# Altium PCB LM2596.PcbDoc
Units mm, origin at the board's own origin, x right, y up, seen from the top; angles counter-clockwise.
Board outline 92.58 x 34.92 mm, 2 copper layers (Top Layer, Bottom Layer); 42 components, 6 nets, 99 pads, 0 vias.
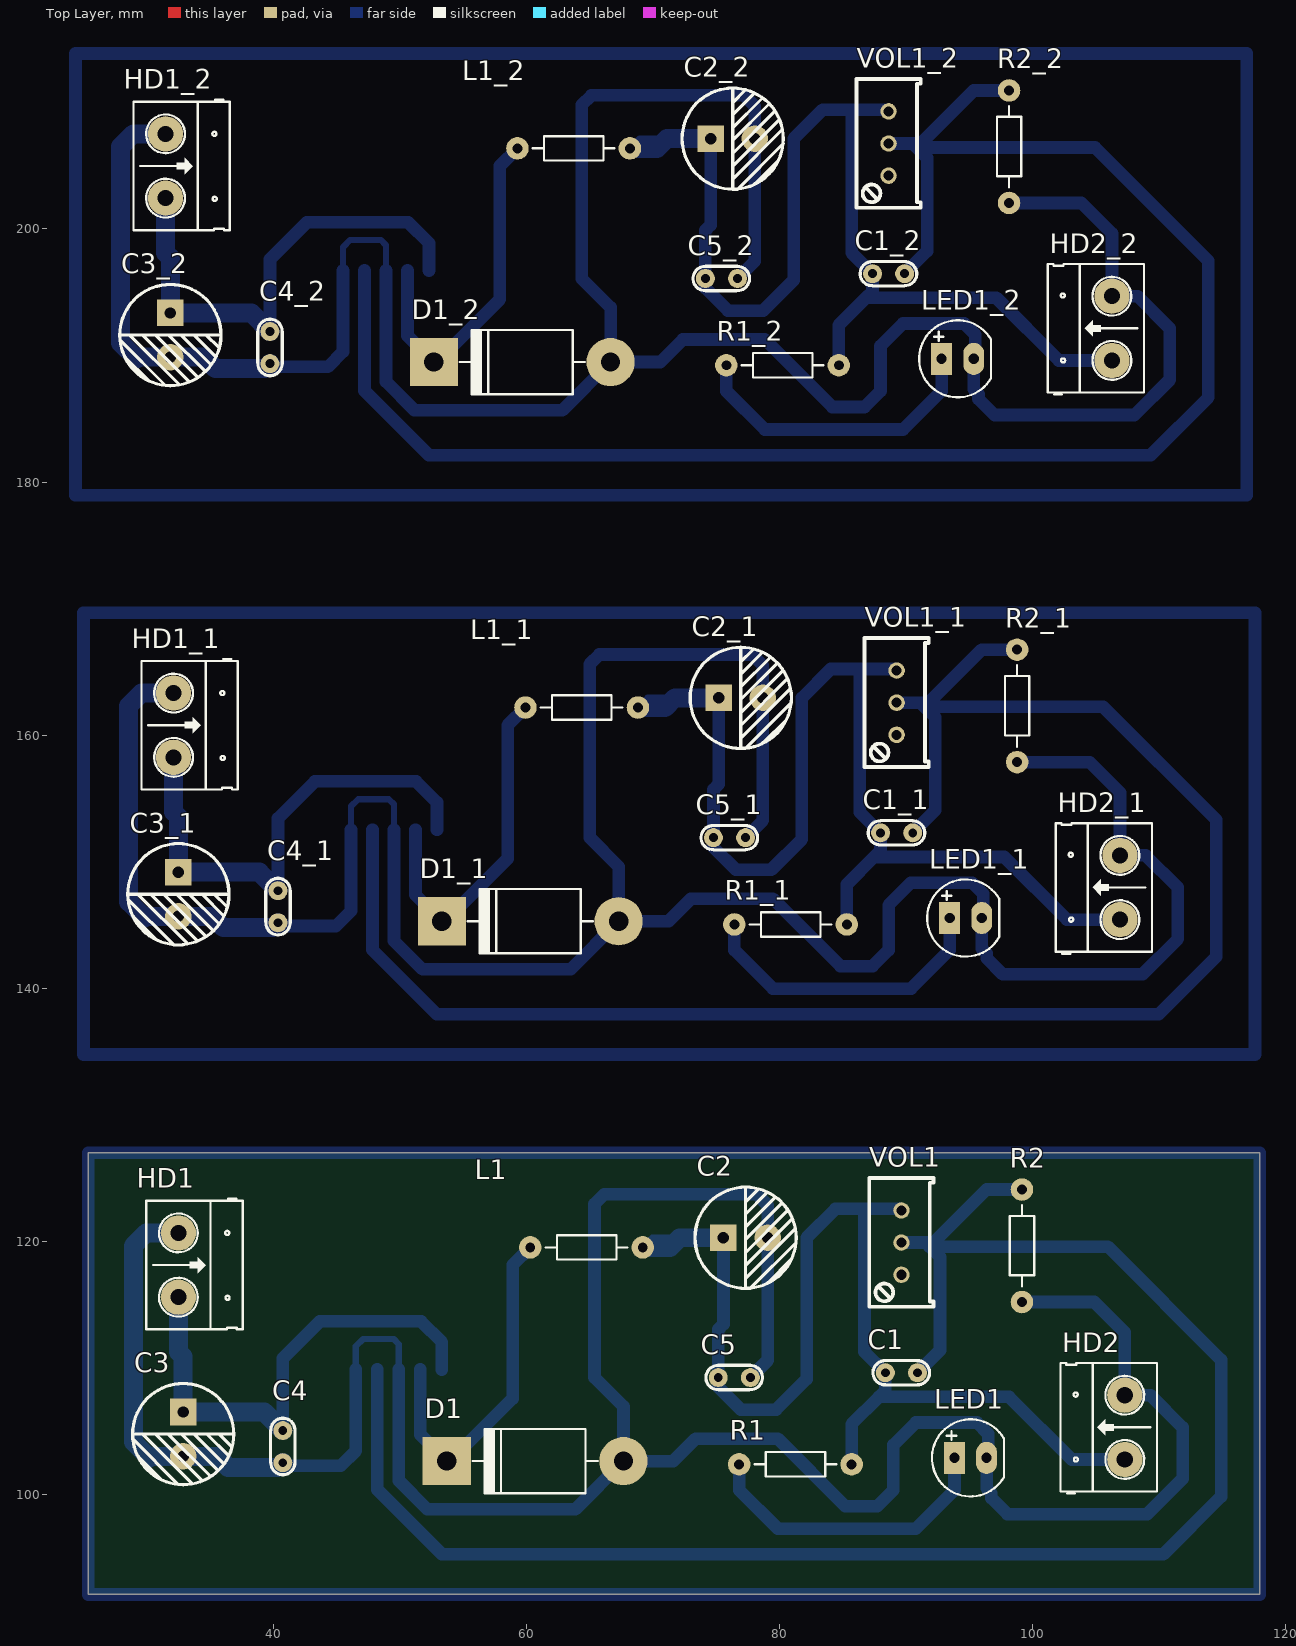
[diagram p0: Top Layer view]
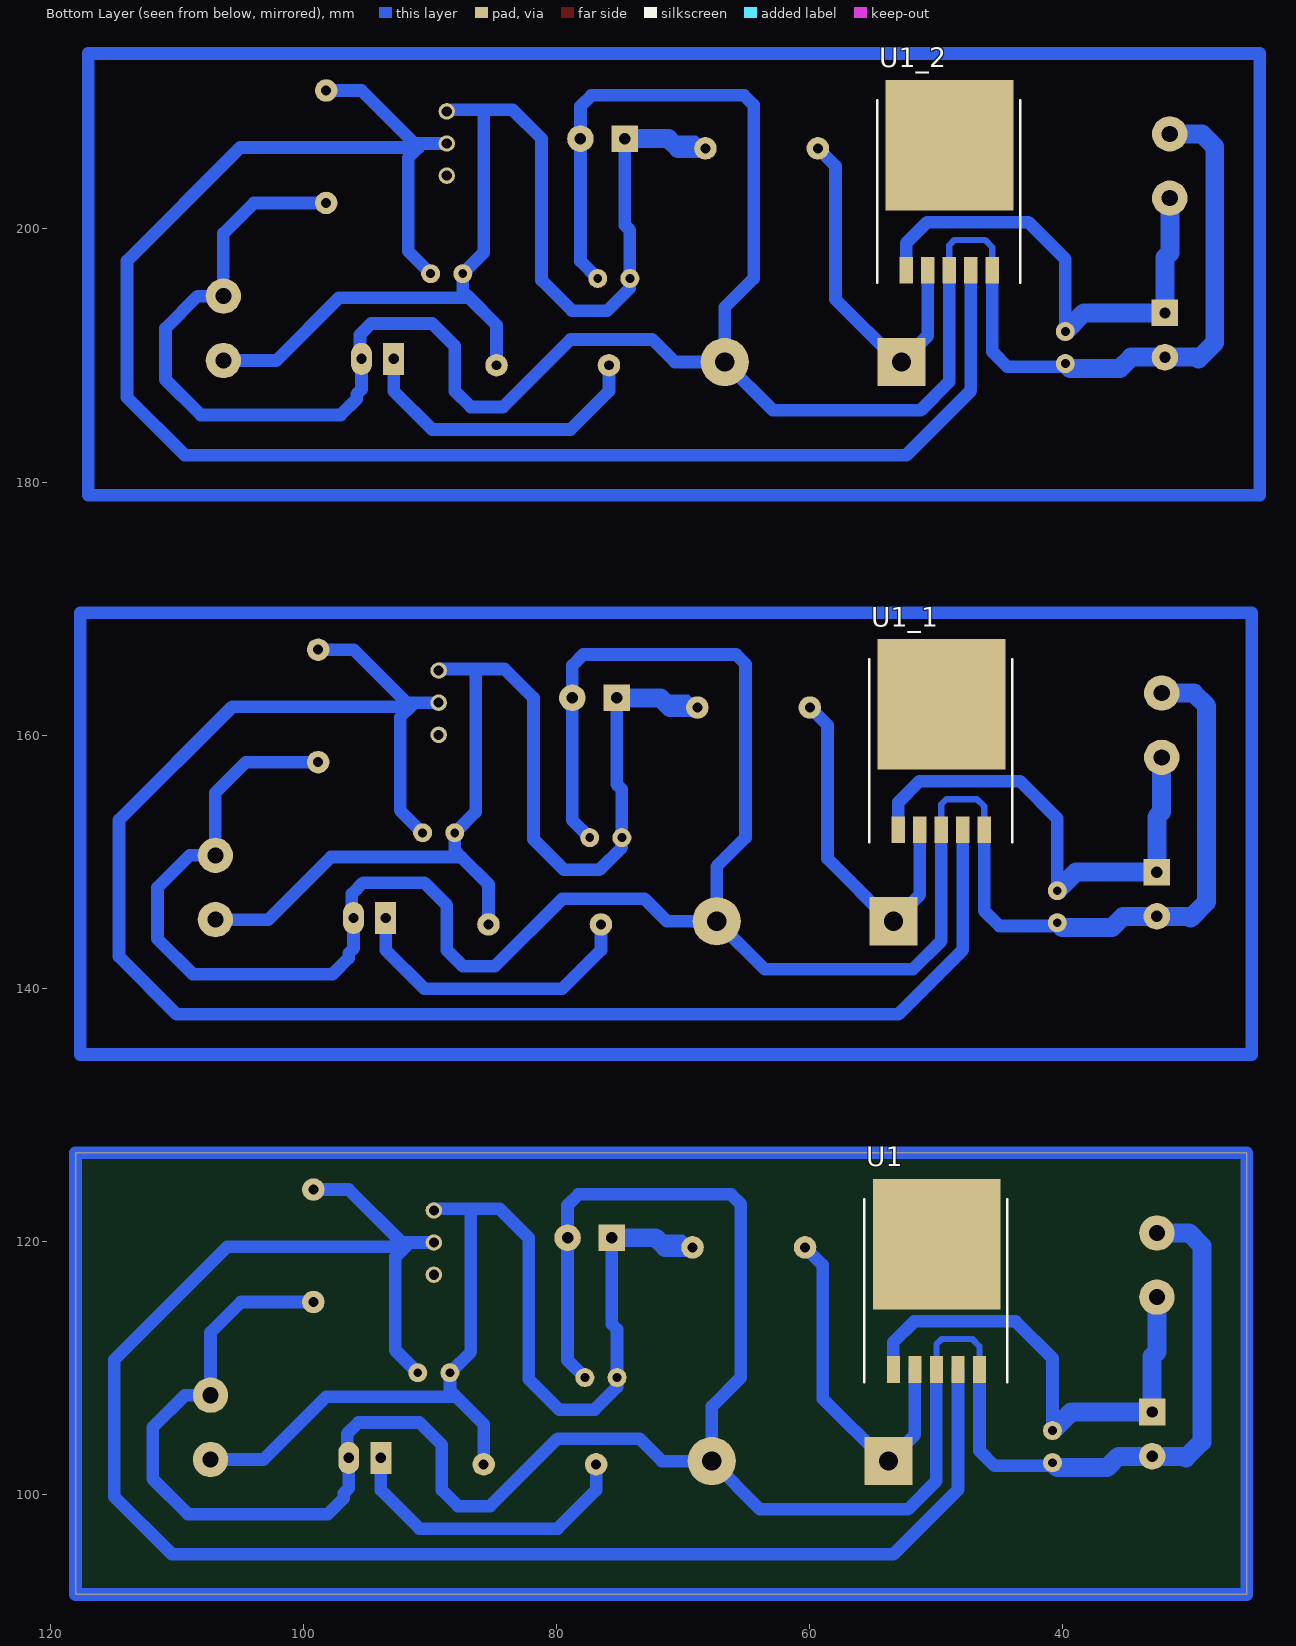
[diagram p1: Bottom Layer view, seen from below]

## Layer stack, top to bottom
Top Solder: solder mask 0.0102, Solder Resist, Dk 3.5
Top Layer: signal copper 0.0356
Dielectric 1: dielectric 0.32, FR-4, Dk 4.8
Bottom Layer: signal copper 0.0356
Bottom Solder: solder mask 0.0102, Solder Resist, Dk 3.5

## Board outline
25.4,92.075 117.983,92.075 117.983,127 25.4,127

## Design rules (kind name [scope] priority, off if disabled: settings)
Clearance [All] p1: gap=0.254 ignorepadtopadclearanceinfootprint=FALSE except(0: Arc-Hole Track-Hole SMDPad-Hole THPad-Hole Via-Hole Fill-Hole Poly-Hole Region-Hole Text-Hole)
PolygonConnect [All] p1: connectstyle=Relief reliefconductorwidth=0.254 reliefentries=4 polygonreliefangle="90 Angle" airgapwidth=0.254
RoutingVias [All] p1: holewidth=0.711 width=1.27 viastyle="Through Hole" minholewidth=0.711 minwidth=1.27 maxholewidth=0.711 maxwidth=1.27
SolderMaskExpansion [All] p1: expansion=0.102
Width [All] p1: maxlimit=1.5 minlimit=0.5 preferedwidth=1
30 further rules are at their usual default settings.

## Classes and differential pairs
component class LM2596: C1 C2 C3 C4 C5 D1 HD1 HD2 L1 LED1 R1 R2 U1 VOL1

## Components (designator, comment, footprint, x,y, rotation, side; value= is the part's Value field where it differs from the comment)
C1 "470uF 16V" "tu gom" 89.662,109.601 r0 top
C1_1 "470uF 16V" "tu gom" 89.281,152.273 r0 top (schematic designator C1)
C1_2 "470uF 16V" "tu gom" 88.646,196.469 r0 top (schematic designator C1)
C2 "220uF-25V" "Tu hoa 8mm" 77.343,120.269 r0 top
C2_1 "220uF-25V" "Tu hoa 8mm" 76.962,162.941 r0 top (schematic designator C2)
C2_2 "220uF-25V" "Tu hoa 8mm" 76.327,207.137 r0 top (schematic designator C2)
C3 "100uF-50V" "tu hoa 8mm" 32.893,104.747 r270 top
C3_1 "100uF-50V" "tu hoa 8mm" 32.512,147.419 r270 top (schematic designator C3)
C3_2 "100uF-50V" "tu hoa 8mm" 31.877,191.615 r270 top (schematic designator C3)
C4 "104" "tu gom" 40.767,103.759 r270 top
C4_1 "104" "tu gom" 40.386,146.431 r270 top (schematic designator C4)
C4_2 "104" "tu gom" 39.751,190.627 r270 top (schematic designator C4)
C5 "104" "tu gom" 76.454,109.22 r0 top
C5_1 "104" "tu gom" 76.073,151.892 r0 top (schematic designator C5)
C5_2 "104" "tu gom" 75.438,196.088 r0 top (schematic designator C5)
D1 "1N5408" D5A 53.721,102.616 r0 top
D1_1 "1N5408" D5A 53.34,145.288 r0 top (schematic designator D1)
D1_2 "1N5408" D5A 52.705,189.484 r0 top (schematic designator D1)
HD1 "Header 2" HED2 32.512,120.65 r270 top
HD1_1 "Header 2" HED2 32.131,163.322 r270 top (schematic designator HD1)
HD1_2 "Header 2" HED2 31.496,207.518 r270 top (schematic designator HD1)
HD2 "Header 2" HED2 107.315,102.743 r90 top
HD2_1 "Header 2" HED2 106.934,145.415 r90 top (schematic designator HD2)
HD2_2 "Header 2" HED2 106.299,189.611 r90 top (schematic designator HD2)
L1 "33mH" R1/4W 60.325,119.507 r0 top
L1_1 "33mH" R1/4W 59.944,162.179 r0 top (schematic designator L1)
L1_2 "33mH" R1/4W 59.309,206.375 r0 top (schematic designator L1)
LED1 "LED" LED-5-RED 93.853,102.87 r0 top value="LED 3 ly Single Colour"
LED1_1 "LED" LED-5-RED 93.472,145.542 r0 top value="LED 3 ly Single Colour" (schematic designator LED1)
LED1_2 "LED" LED-5-RED 92.837,189.738 r0 top value="LED 3 ly Single Colour" (schematic designator LED1)
R1 "1K" R1/4W 76.835,102.362 r0 top value="R1/4W - 1K"
R1_1 "1K" R1/4W 76.454,145.034 r0 top value="R1/4W - 1K" (schematic designator R1)
R1_2 "1K" R1/4W 75.819,189.23 r0 top value="R1/4W - 1K" (schematic designator R1)
R2 "1k" R1/4W 99.187,115.189 r90 top value="R1/4W - 1K"
R2_1 "1k" R1/4W 98.806,157.861 r90 top value="R1/4W - 1K" (schematic designator R2)
R2_2 "1k" R1/4W 98.171,202.057 r90 top value="R1/4W - 1K" (schematic designator R2)
U1 "LM2596-ADJ" D2-PACK5 53.34,109.855 r180 bottom
U1_1 "LM2596-ADJ" D2-PACK5 52.959,152.527 r180 bottom (schematic designator U1)
U1_2 "LM2596-ADJ" D2-PACK5 52.324,196.723 r180 bottom (schematic designator U1)
VOL1 "10K" VR1 89.662,117.348 r90 top value="Volume Dual 50K"
VOL1_1 "10K" VR1 89.281,160.02 r90 top value="Volume Dual 50K" (schematic designator VOL1)
VOL1_2 "10K" VR1 88.646,204.216 r90 top value="Volume Dual 50K" (schematic designator VOL1)

## Footprints (in the part's own frame and the unit in brackets; to place one, negate y for a bottom-side part, rotate by r counter-clockwise, add the part's x,y. Pads: shape width x height; smd on the part's side, far side on the other; paste and mask are expansions set on the pad)
D2-PACK5 [mm] "D2-PAK; 5 Leads; Body 14.4 (inc. leads) x 10.4 mm (LxW max)"
  rect 1.05x2.1 smd: 1(0,0) 2(1.7,0) 3(3.4,0) 4(5.1,0) 5(6.8,0)
  rect 10.1x10.3 smd: 3(3.429,9.906)
  silkscreen extent -2.29,-0.99 9.02,13.46, body extent -1.6,-0.38 8.4,15.29, height 5.18
D5A [mil] "Diode 5A, W 200mil, L 550mil"
  round 150 hole 60: 1(550,0)
  rect 150x150 hole 60: 2(0,0)
  silkscreen extent 80,-100 470,100, body extent -52,-106 590,103, height 254
HED2 [mil] "Header 2, 2 pin, hight 300mil, Pin to Pin 200, Colour Green"
  round 110 hole 50: 1(0,0) 2(200,0)
  silkscreen extent -106,-100 300,200, body extent -92,-140 302,155, height 394
LED-5-RED [mil] "LED 2 PIN, 5 ly , Only colour,pin to pin 100mil"
  rect 65x100 hole 32: 1(0,0)
  oval 65x100 hole 32: 2(100,0)
  silkscreen extent -70,-120 154,120, body extent -65,-119 149,118, height 339
R1/4W [mil] "R 1/4W, 2 Pin, 350mil"
  round 70 hole 31: 1(0,0) 2(350,0)
  silkscreen extent 48,-38 302,38, body extent -40,-47 386,47, height 111
"tu gom" [mm] "Tu gom mini"
  round 1.5 hole 0.7: 1(-1.27,0) 2(1.27,0)
  silkscreen extent -2.25,-0.97 2.22,0.97, body extent -2.92,-0.85 2.92,0.85, height 6.12
"Tu hoa 8mm" [mm]
  rect 2.1x2.1 hole 0.9: 1(-1.75,0)
  round 2.1 hole 0.9: 2(1.75,0)
  silkscreen extent -4,-4 4,4, body extent -4.1,-4.07 4.1,4.13, height 14.4
"tu hoa 8mm" [mm]
  rect 2.1x2.1 hole 0.9: 1(-1.75,0)
  round 2.1 hole 0.9: 2(1.75,0)
  silkscreen extent -4,-4 4,4, body extent -4.1,-4.07 4.1,4.13, height 14.4
VR1 [mm] "Variable Resistor"
  round 1.3 hole 0.8 mask+0.1: 1(0,0) 2(2.54,0) 3(5.08,0)
  silkscreen extent -2.54,-2.54 7.65,2.54, body extent -2.22,-3.3 7.3,2.79, height 11.56

## Part data
C1 C1_1 C1_2 C4 C4_1 C4_2 C5 C5_1 C5_2: library part "Tu gom 100 50V", "C?m", Chung_Loai=C?m, Don_Vi=Con, Ma_Hang=MH004765, So_Chan=2, Ten_Linh_Kien="T? g?m 100 10pF 50V"
C2 C2_1 C2_2: library part "Tu Hoa 220uF 25V 8x10", "C?m", Chung_Loai=C?m, Don_Vi=Con, Ma_Hang=MH006864, So_Chan=2, Ten_Linh_Kien="T? Hóa 220uF 25V 8x10MM"
C3 C3_1 C3_2: library part "Tu Hoa 100uF 50V 8x11", "C?m", Chung_Loai=C?m, Don_Vi=Con, Ma_Hang=MH006872, So_Chan=2, Ten_Linh_Kien="T? Hóa 100uF 50V 8x11MM"
D1 D1_1 D1_2: library part D5A, "Diode 5A"
HD1 HD1_1 HD1_2 HD2 HD2_1 HD2_2: library part Hed2, "Header 2 (Green)"
L1 L1_1 L1_2: library part "Cuon cam 220uH", "C?m", Chung_Loai=C?m, Don_Vi=Con, Ma_Hang=MH002208, So_Chan=2, Ten_Linh_Kien="Cu?n C?m 220uH 3A 8x10MM"
LED1 LED1_1 LED1_2: "LED Single colour Green and Red"
R1 R1_1 R1_2 R2 R2_1 R2_2: library part R1/4W, "Resistor 1/4W"
U1 U1_1 U1_2: library part LM2596, "Simple Switcher 3A Step Down Voltage Regulator", Code_JEDEC=TS-001-AA, ComponentLink1Description="Manufacturer Link", ComponentLink1URL=http://www.national.com/, ComponentLink2Description=Datasheet, ComponentLink2URL=H:\LIBRARY\LIBRARY.Datasheet\LM2576.pdf, ComponentLink3Description="URL Link1", ComponentLink3URL=http://www.national.com/pf/LM/LM2575HV.html, DatasheetVersion=May-1999, Note="Tab is connected to GND", PackageDescription="TO, Thru-Hole, Vertical, Heatsink Mounted; 5 In-Line Leads; Pitch 1.70 mm", PackageReference=T05A, PackageVersion=2000, Price="15000 VND", Published=15-Apr-2002, Publisher="Altium Limited"
VOL1 VOL1_1 VOL1_2: library part VOL-D, "Volume control Dual"

## Nets (pads, with @x,y where several pads share a name; then routed paths per layer and width w, separated by ;. In a path a pad name is that pad's centre, name@x,y a point inside that pad or via, vN(x,y) a via of type N, cw(c..) or ccw(c..) an arc to the next point about the centre after c; other vN are vias at no path point)
GND: C2.2 C3.2 C4.2 C5.2 D1.1 HD1.1 HD2.2 LED1.2 R2.1 U1.3@49.94,109.855 U1.5 | length 214.5
  Bottom Layer w0.5: U1.5 46.54,111.691 47.117,112.268 49.53,112.268 49.94,111.858 U1.3@49.94,109.855
  Bottom Layer w1: C4.2 41.021,102.235 45.339,102.235 46.54,103.436 U1.5 ; U1.3@49.94,109.855 49.94,101.063 52.197,98.806 63.881,98.806 D1.1 ; C5.2 79.093,110.589 C2.2 79.093,122.837 78.232,123.698 66.167,123.698 65.405,122.936 65.405,109.22 67.691,106.934 D1.1 ; R2.1 104.902,115.189 107.315,112.776 HD2.2 109.347,107.823 111.887,105.283 111.887,101.219 109.093,98.425 98.044,98.425 96.774,99.695 96.774,100.076 96.393,100.457 LED1.2 96.52,102.997 96.52,104.775 95.631,105.664 90.805,105.664 89.027,103.886 89.027,100.33 87.757,99.06 85.217,99.06 79.883,104.394 73.406,104.394 71.628,102.616 D1.1
  Bottom Layer w1.5: HD1.1 29.972,120.65 28.956,119.634 28.956,104.14 30.226,102.87 30.353,102.997 C3.2 35.56,102.997 36.449,102.108 40.386,102.108 C4.2
NetC1_1: C1.1 C2.1 C5.1 HD2.1 L1.2 R1.2 VOL1.3 | length 93.8
  Bottom Layer w0.5: L1.2 69.977,120.269 72.136,120.269
  Bottom Layer w1: C2.1 75.593,113.439 75.184,113.03 C5.1 75.184,108.458 76.962,106.68 79.756,106.68 82.169,109.093 82.169,120.269 84.455,122.555 86.741,122.555 ; R1.2 85.725,105.537 87.884,107.696 ; VOL1.3 89.535,122.555 86.741,122.555 ; HD2.1 103.124,102.743 98.171,107.696 87.884,107.696 ; 86.741,122.555 86.741,111.252 C1.1 88.392,108.204 87.884,107.696
  Bottom Layer w1.5: L1.2 71.374,119.507 72.136,120.269 C2.1
NetC1_2: C1.2 R2.2 U1.4 VOL1.2 | length 140.5
  Bottom Layer w1: U1.4 48.24,100.35 53.34,95.25 110.363,95.25 114.935,99.822 114.935,110.617 105.981,119.57 91.885,119.57 ; VOL1.2 91.567,119.888 ; C1.2 92.71,111.379 92.71,118.745 91.885,119.57 ; R2.2 96.393,124.079 92.202,119.888 91.567,119.888 ; 91.567,119.888 91.885,119.57
NetC3_1: C3.1 C4.1 HD1.2 U1.1 | length 40.1
  Bottom Layer w1: C4.1 40.767,110.744 43.688,113.665 51.689,113.665 53.34,112.014 U1.1
  Bottom Layer w1.5: HD1.2 32.512,111.252 32.893,110.871 C3.1 39.299,106.497 C4.1
NetD1_2: D1.2 L1.1 U1.2 | length 27.9
  Bottom Layer w1: U1.2 51.64,104.697 D1.2 53.975,102.616 58.928,107.569 58.928,118.11 L1.1
NetLED1_1: LED1.1 R1.1 | length 24.1
  Bottom Layer w1: R1.1 76.835,100.33 79.883,97.282 90.805,97.282 93.853,100.33 LED1.1
pads on no net: C1_1.1 C1_1.2 C1_2.1 C1_2.2 C2_1.1 C2_1.2 C2_2.1 C2_2.2 C3_1.1 C3_1.2 C3_2.1 C3_2.2 C4_1.1 C4_1.2 C4_2.1 C4_2.2 C5_1.1 C5_1.2 C5_2.1 C5_2.2 D1_1.1 D1_1.2 D1_2.1 D1_2.2 HD1_1.1 HD1_1.2 HD1_2.1 HD1_2.2 HD2_1.1 HD2_1.2 HD2_2.1 HD2_2.2 L1_1.1 L1_1.2 L1_2.1 L1_2.2 LED1_1.1 LED1_1.2 LED1_2.1 LED1_2.2 R1_1.1 R1_1.2 R1_2.1 R1_2.2 R2_1.1 R2_1.2 R2_2.1 R2_2.2 U1.3@49.911,119.761 U1_1.1 U1_1.2 U1_1.3 U1_1.4 U1_1.5 U1_2.1 U1_2.2 U1_2.3 U1_2.4 U1_2.5 VOL1.1 VOL1_1.1 VOL1_1.2 VOL1_1.3 VOL1_2.1 VOL1_2.2 VOL1_2.3
copper on no net: | length 1846.7
  Bottom Layer w0.5: 45.524,196.723 45.524,198.559 46.101,199.136 48.514,199.136 48.924,198.726 48.924,196.723 ; 46.159,152.527 46.159,154.363 46.736,154.94 49.149,154.94 49.559,154.53 49.559,152.527 ; 68.199,206.375 68.961,207.137 71.12,207.137 ; 68.834,162.179 69.596,162.941 71.755,162.941
  Bottom Layer w1: 39.751,189.357 40.005,189.103 44.323,189.103 45.524,190.304 45.524,196.723 ; 39.751,191.897 39.751,197.612 42.672,200.533 50.673,200.533 52.324,198.882 52.324,196.723 ; 40.386,145.161 40.64,144.907 44.958,144.907 46.159,146.108 46.159,152.527 ; 40.386,147.701 40.386,153.416 43.307,156.337 51.308,156.337 52.959,154.686 52.959,152.527 ; 47.224,196.723 47.224,187.218 52.324,182.118 109.347,182.118 113.919,186.69 113.919,197.485 104.965,206.439 90.868,206.439 ; 47.859,152.527 47.859,143.022 52.959,137.922 109.982,137.922 114.554,142.494 114.554,153.289 105.6,162.243 91.504,162.243 ; 48.924,196.723 48.924,187.931 51.181,185.674 62.865,185.674 66.675,189.484 ; 49.559,152.527 49.559,143.735 51.816,141.478 63.5,141.478 67.31,145.288 ; 50.624,196.723 50.624,191.565 52.705,189.484 52.959,189.484 57.912,194.437 57.912,204.978 59.309,206.375 ; 51.259,152.527 51.259,147.369 53.34,145.288 53.594,145.288 58.547,150.241 58.547,160.782 59.944,162.179 ; 74.577,207.137 74.577,200.307 74.168,199.898 74.168,196.088 74.168,195.326 75.946,193.548 78.74,193.548 81.153,195.961 81.153,207.137 83.439,209.423 85.725,209.423 ; 75.212,162.941 75.212,156.111 74.803,155.702 74.803,151.892 74.803,151.13 76.581,149.352 79.375,149.352 81.788,151.765 81.788,162.941 84.074,165.227 86.36,165.227 ; 75.819,189.23 75.819,187.198 78.867,184.15 89.789,184.15 92.837,187.198 92.837,189.738 ; 76.454,145.034 76.454,143.002 79.502,139.954 90.424,139.954 93.472,143.002 93.472,145.542 ; 76.708,196.088 78.077,197.457 78.077,207.137 78.077,209.705 77.216,210.566 65.151,210.566 64.389,209.804 64.389,196.088 66.675,193.802 66.675,189.484 ; 77.343,151.892 78.712,153.261 78.712,162.941 78.712,165.509 77.851,166.37 65.786,166.37 65.024,165.608 65.024,151.892 67.31,149.606 67.31,145.288 ; 84.709,189.23 84.709,192.405 86.868,194.564 ; 85.344,145.034 85.344,148.209 87.503,150.368 ; 88.646,206.756 90.551,206.756 ; 88.646,209.296 88.519,209.423 85.725,209.423 ; 89.281,162.56 91.186,162.56 ; 89.281,165.1 89.154,165.227 86.36,165.227 ; 89.916,196.469 91.694,198.247 91.694,205.613 90.868,206.439 ; 90.551,152.273 92.329,154.051 92.329,161.417 91.504,162.243 ; 98.171,202.057 103.886,202.057 106.299,199.644 106.299,194.691 108.331,194.691 110.871,192.151 110.871,188.087 108.077,185.293 97.028,185.293 95.758,186.563 95.758,186.944 95.377,187.325 95.377,189.738 95.504,189.865 95.504,191.643 94.615,192.532 89.789,192.532 88.011,190.754 88.011,187.198 86.741,185.928 84.201,185.928 78.867,191.262 72.39,191.262 70.612,189.484 66.675,189.484 ; 98.171,210.947 95.377,210.947 91.186,206.756 90.551,206.756 ; 98.806,157.861 104.521,157.861 106.934,155.448 106.934,150.495 108.966,150.495 111.506,147.955 111.506,143.891 108.712,141.097 97.663,141.097 96.393,142.367 96.393,142.748 96.012,143.129 96.012,145.542 96.139,145.669 96.139,147.447 95.25,148.336 90.424,148.336 88.646,146.558 88.646,143.002 87.376,141.732 84.836,141.732 79.502,147.066 73.025,147.066 71.247,145.288 67.31,145.288 ; 98.806,166.751 96.012,166.751 91.821,162.56 91.186,162.56 ; 106.299,189.611 102.108,189.611 97.155,194.564 86.868,194.564 ; 106.934,145.415 102.743,145.415 97.79,150.368 87.503,150.368 ; 85.725,209.423 85.725,198.12 87.376,196.469 87.376,195.072 86.868,194.564 ; 86.36,165.227 86.36,153.924 88.011,152.273 88.011,150.876 87.503,150.368 ; 90.551,206.756 90.868,206.439 ; 91.186,162.56 91.504,162.243 ; 24.384,178.943 24.384,213.868 116.967,213.868 116.967,178.943 24.384,178.943 ; 25.019,134.747 25.019,169.672 117.602,169.672 117.602,134.747 25.019,134.747 ; 25.4,92.075 117.983,92.075 117.983,127 25.4,127 25.4,92.075
  Bottom Layer w1.5: 31.496,202.438 31.496,198.12 31.877,197.739 31.877,193.365 38.283,193.365 39.751,191.897 ; 31.496,207.518 28.956,207.518 27.94,206.502 27.94,191.008 29.21,189.738 29.337,189.865 31.877,189.865 34.544,189.865 35.433,188.976 39.37,188.976 39.751,189.357 ; 32.131,158.242 32.131,153.924 32.512,153.543 32.512,149.169 38.918,149.169 40.386,147.701 ; 32.131,163.322 29.591,163.322 28.575,162.306 28.575,146.812 29.845,145.542 29.972,145.669 32.512,145.669 35.179,145.669 36.068,144.78 40.005,144.78 40.386,145.161 ; 68.199,206.375 70.358,206.375 71.12,207.137 74.577,207.137 ; 68.834,162.179 70.993,162.179 71.755,162.941 75.212,162.941

## Text inside footprints (layer, text, board x,y; h text height)
VOL1: Mechanical 1 "1" at 90.152,117.208 h1 r90; Mechanical 1 "2" at 90.192,119.588 h1 r90; Mechanical 1 "3" at 90.172,122.118 h1 r90
VOL1_1: Mechanical 1 "1" at 89.771,159.88 h1 r90; Mechanical 1 "2" at 89.811,162.26 h1 r90; Mechanical 1 "3" at 89.791,164.79 h1 r90
VOL1_2: Mechanical 1 "1" at 89.136,204.076 h1 r90; Mechanical 1 "2" at 89.176,206.456 h1 r90; Mechanical 1 "3" at 89.156,208.986 h1 r90